# Altium PCB GCM_PCB.PcbDoc (part 1 of 2)
Units mm, origin at the board's own origin, x right, y up, seen from the top; angles counter-clockwise.
Board outline 98 x 97 mm, 4 copper layers (Top Layer, GND, Power and signals, Bottom Layer), stack 0.603 mm thick; 110 components, 82 nets, 466 pads, 160 vias.
Unrouted connection lines stored in the file: 67.
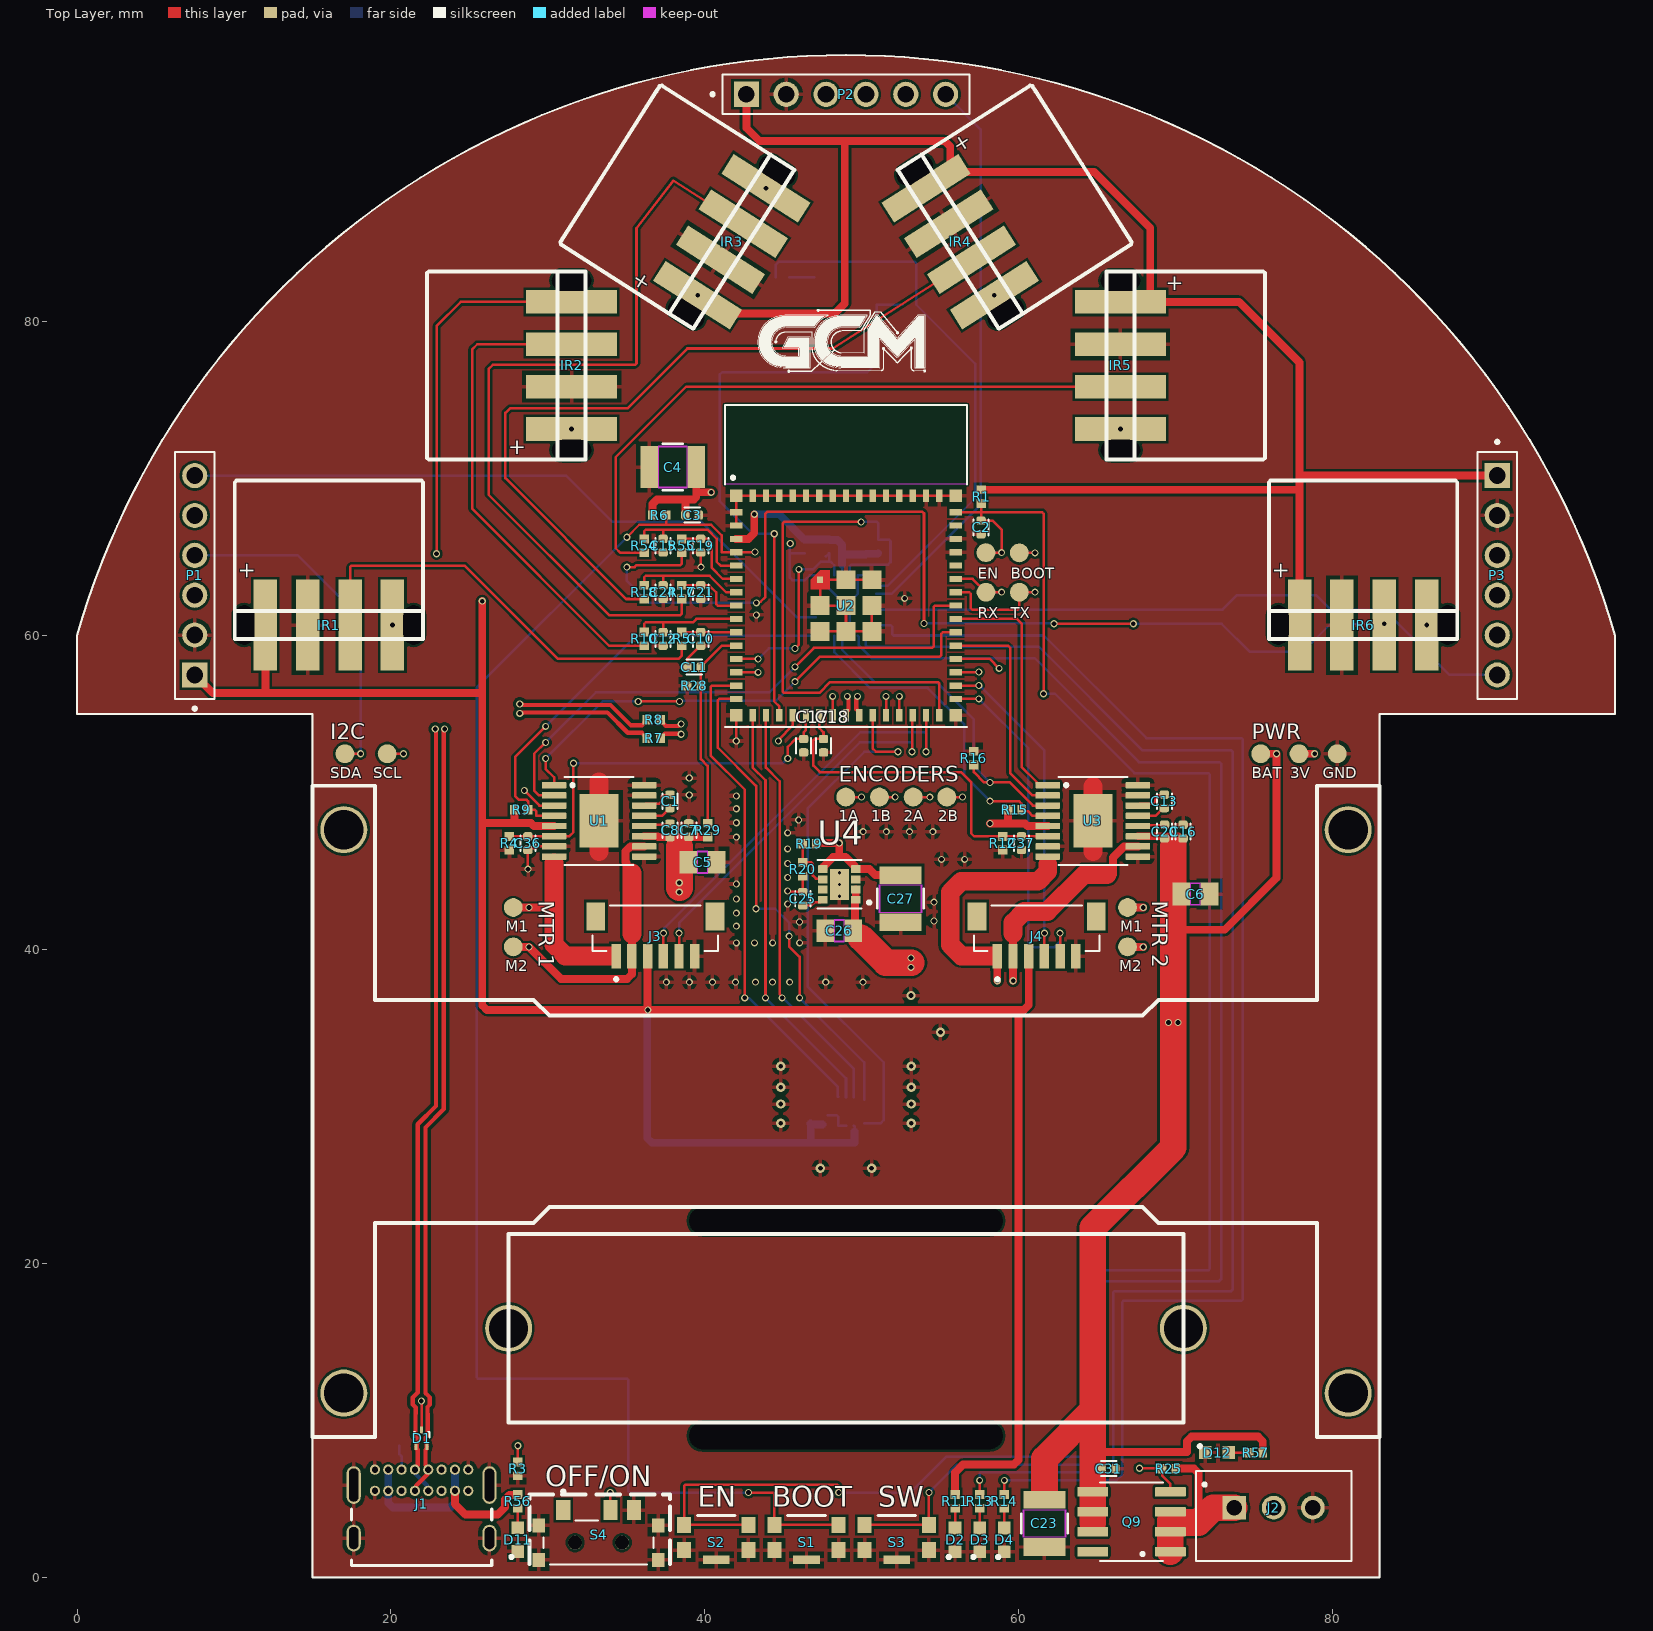
[diagram p0: Top Layer view]
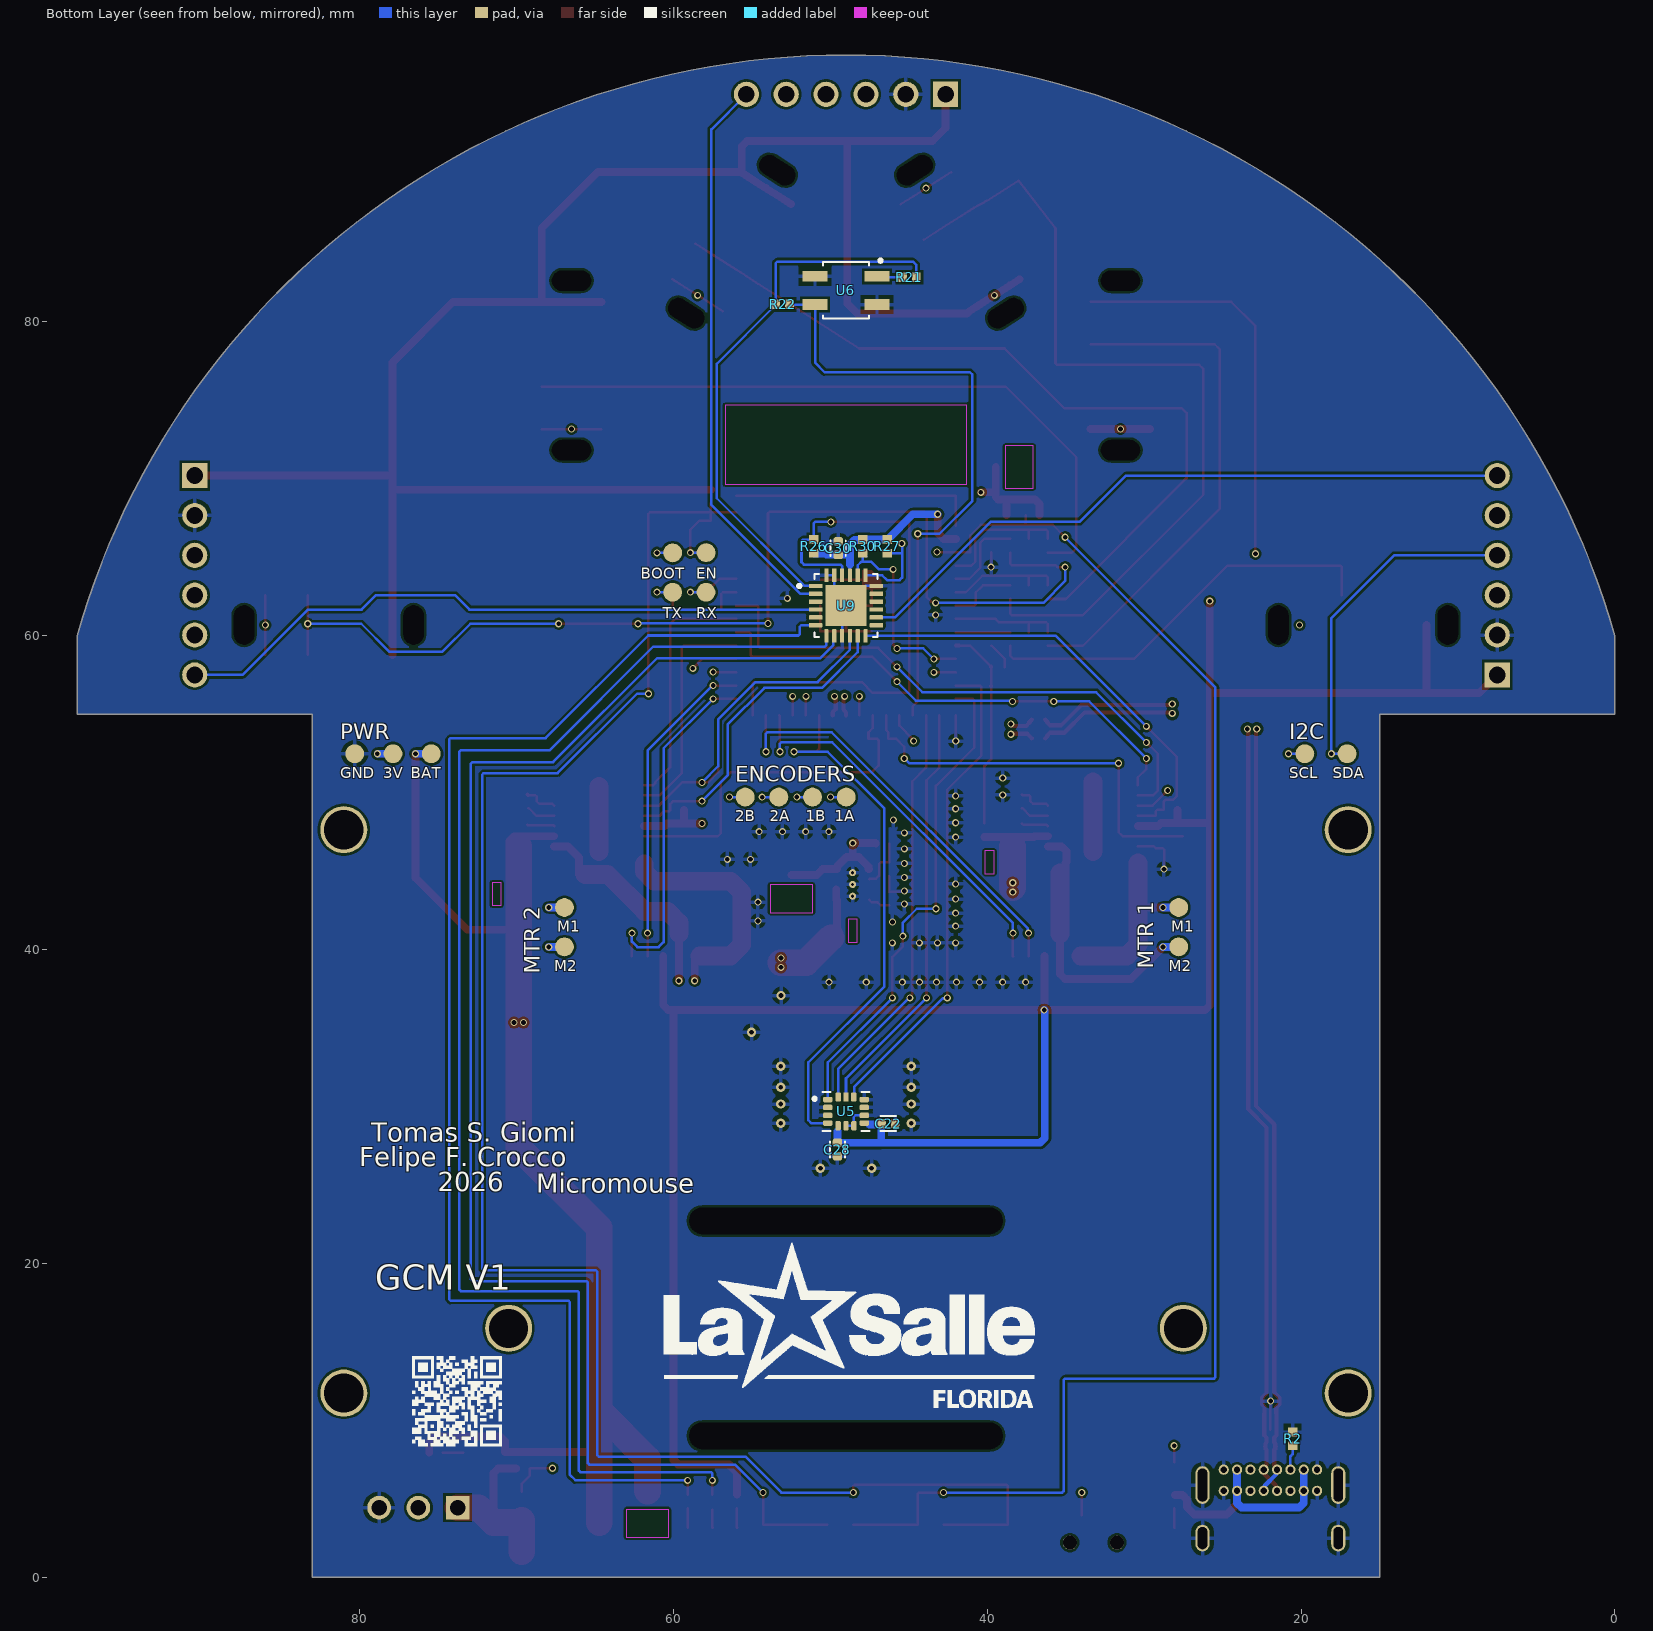
[diagram p1: Bottom Layer view, seen from below]
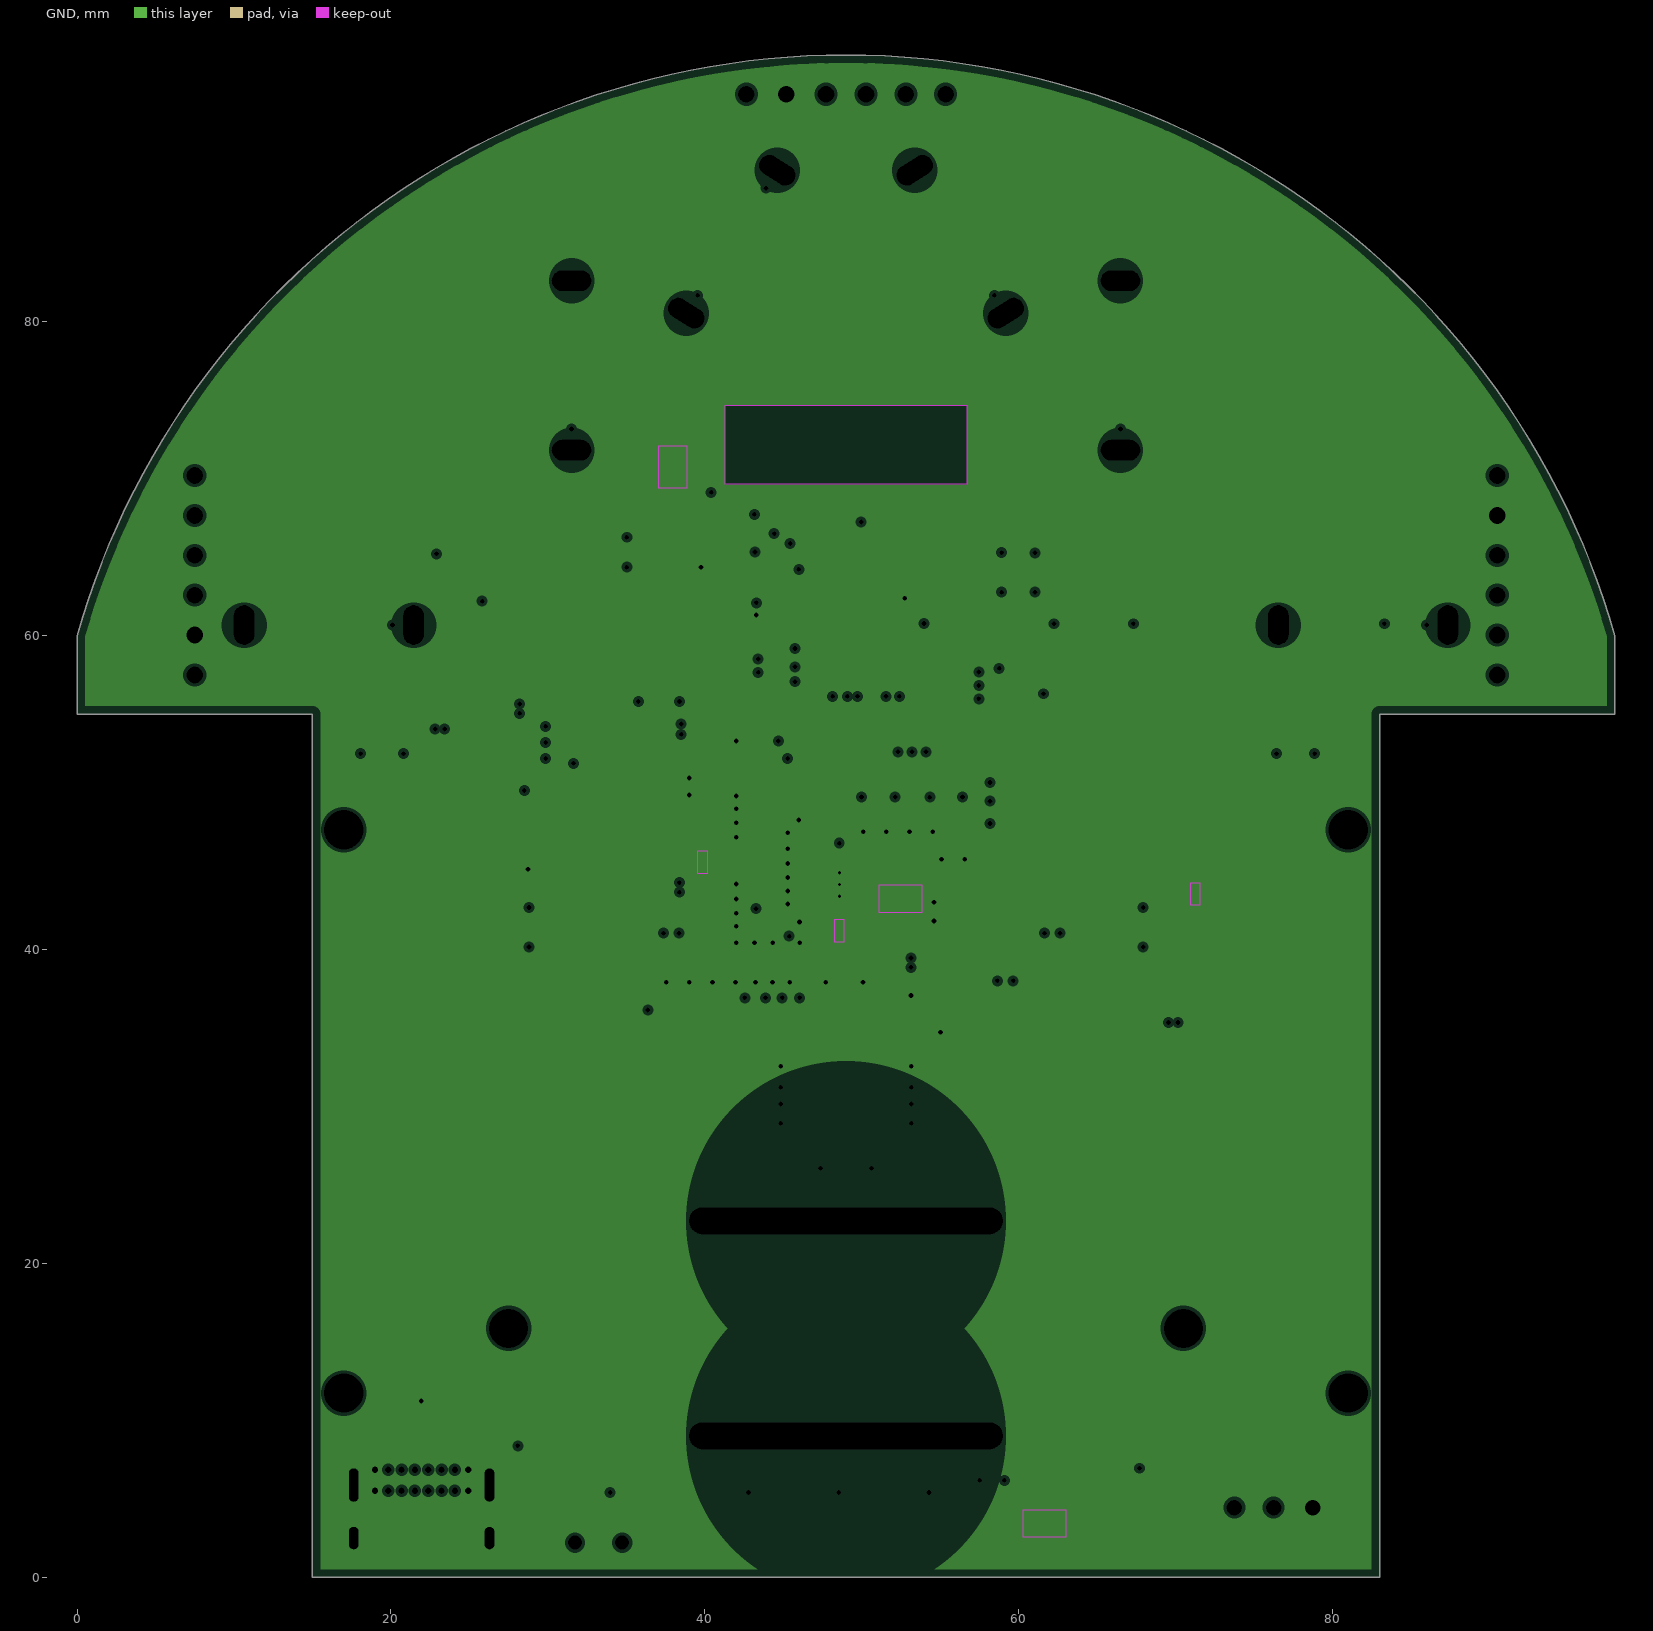
[diagram p2: GND, clearances drawn from the general rule]
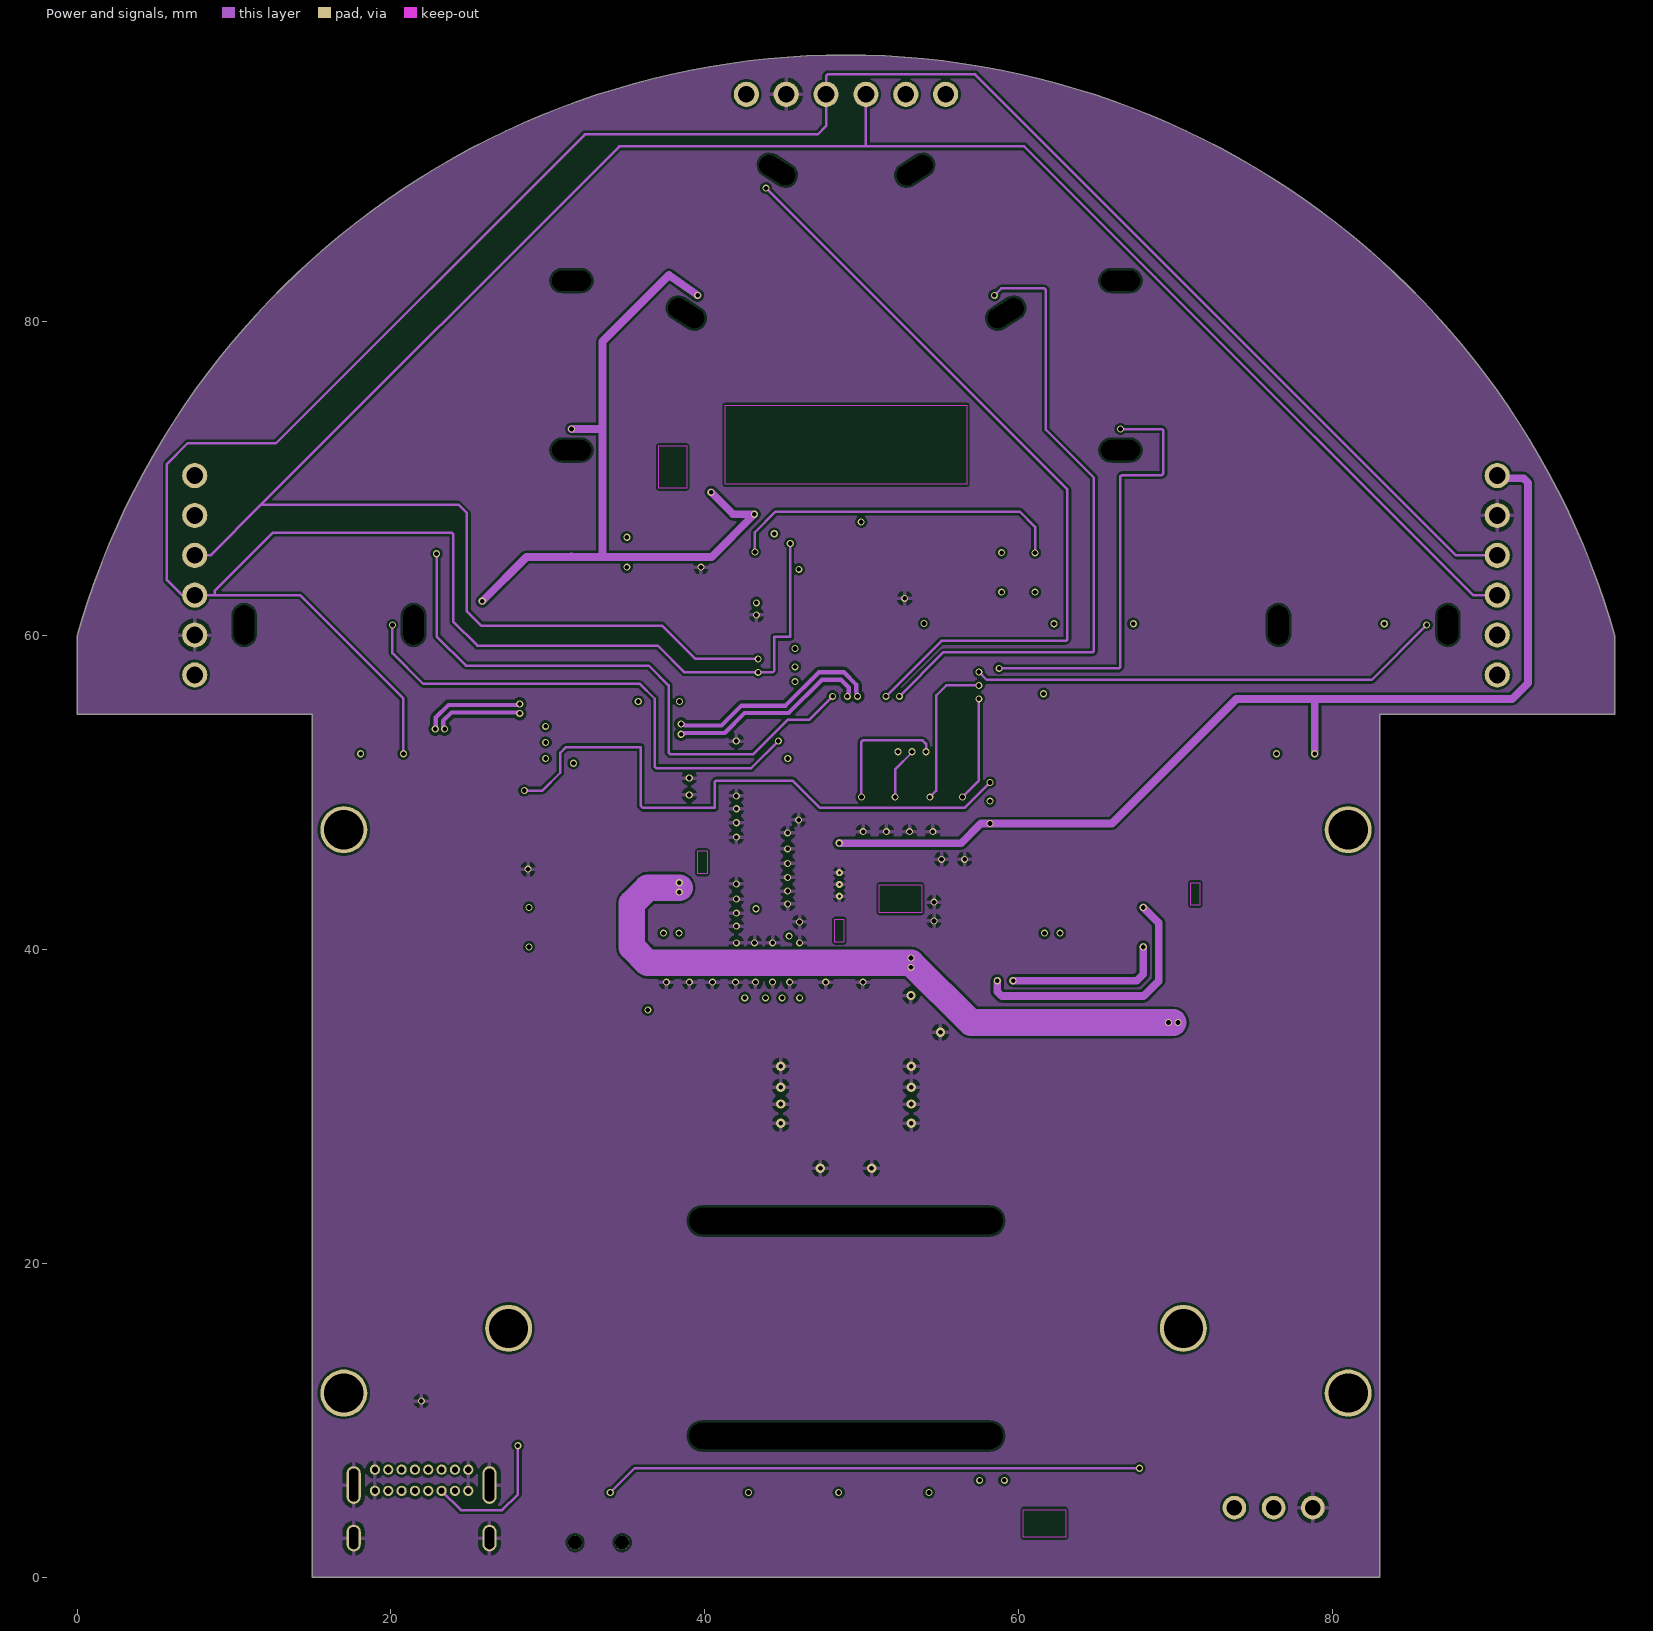
[diagram p3: Power and signals]

## Layer stack, top to bottom
Top Solder: solder mask 0.0102, Solder Resist, Dk 3.5
Top Layer: signal copper 0.0356
Dielectric 2: prepreg 0.0711, PP-006, Dk 4.1
GND: plane copper 0.035, net GND
Dielectric 1: dielectric 0.32, FR-4, Dk 4.8
Power and signals: signal copper 0.035
Dielectric 3: prepreg 0.0711, PP-006, Dk 4.1
Bottom Layer: signal copper 0.0356
Bottom Solder: solder mask 0.0102, Solder Resist, Dk 3.5

## Board outline
0,55 15,55 15,0 83,0 83,55 98,55 98,60 ccw(c49,46.054) 0,60

## Design rules (kind name [scope] priority, off if disabled: settings)
Clearance Clearance_USB [InNetClass('USB') vs InNet('GND')] p1: gap=0.203 ignorepadtopadclearanceinfootprint=FALSE
Clearance [All] p2: gap=0.15 ignorepadtopadclearanceinfootprint=FALSE
ComponentClearance [All] p1: gap=0 collisioncheckmode=3 verticalgap=2540 showdistances=FALSE checkcomponentboundary=TRUE
DiffPairsRouting [All] p1: maxlimit=0.23 minlimit=0.18 mostfreqgap=0.203 toplayer_minwidth=0.25 toplayer_maxwidth=0.29 toplayer_prefwidth=0.27 midlayer1_minwidth=0.25 midlayer1_maxwidth=0.29 midlayer1_prefwidth=0.27 bottomlayer_minwidth=0.25 bottomlayer_maxwidth=0.29 bottomlayer_prefwidth=0.27 maxuncoupledlength=12.7
PlaneClearance [All] p1: clearance=0.2
PlaneConnect [All] p1: planeconnectstyle=Relief reliefexpansion=0.508 reliefentries=4 reliefconductorwidth=0.254 reliefairgap=0.254
PolygonConnect [All] p1: connectstyle=Relief reliefconductorwidth=0.254 reliefentries=4 polygonreliefangle="90 Angle" airgapwidth=0.254
RoutingVias [All] p1: holewidth=0.3 width=0.45 viastyle="Through Hole" minholewidth=0.3 minwidth=0.45 maxholewidth=0.3 maxwidth=0.45
SolderMaskExpansion [All] p1: expansion=0.102 istentingtop=FALSE
Width [All] p1: maxlimit=1.7 minlimit=0.16 preferedwidth=0.5
26 further rules are at their usual default settings.

## Classes and differential pairs
net class 1.2mm: "1 M1" "1 M2" "2 M1" "2 M2" BAT "VM M1"
net class 0.5mm: VDDIO
component class GCM_SCH_ESP: C1 C2 C3 C4 C5 C6 C7 C8 C10 C11 C12 C13 C15 C16 C17 C18 C19 C20 C21 C22 C23 C24 C25 C26 C27 C28 C30 C31 C36 C37 D1 D2 D3 D4 D11 D12 H1 H2 H3 H4 H5 H6 IR1 IR2 IR3 IR4 IR5 IR6 J1 J2 J3 J4 P1 P2 P3 Q9 R1 R2 R3 R4 R5 R6 R7 R8 R9 R10 R11 R12 R13 R14 R15 R16 R17 R18 R19 R20 R21 R22 R25 R26 R27 R28 R29 R30 R54 R55 R56 R57 S1 S2 S3 S4 U1 U2 U3 U5 U6 U9
differential pair 2USB: +2USB_P -2USB_N
differential pair USB: +USB_P -USB_N

## Components (designator, comment, footprint, x,y, rotation, side; value= is the part's Value field where it differs from the comment)
C1 "C426639" CAPC1005X55N 37.786,49.444 r90 top
C2 "C541465" CAPC1005X55N 57.606,66.897 r90 top
C3 "C541465" CAPC1005X55N 39.193,67.688 r0 top
C4 "C126615" CAP_CC1210_YAG 37.956,70.747 r0 top
C5 "C326595" CAP_CC0805_YAG 39.856,45.567 r180 top
C6 "C326595" CAP_CC0805_YAG 71.266,43.537 r180 top
C7 "C541465" CAPC1005X55N 38.986,47.607 r90 top
C8 "C541465" CAPC1005X55N 37.786,47.597 r270 top
C10 "C76971" CAPC1005X55N 39.746,59.792 r270 top
C11 "C541465" CAPC1005X55N 39.321,57.996 r180 top
C12 "C76971" CAPC1005X55N 37.346,59.792 r270 top
C13 "C426639" CAPC1005X55N 69.286,49.444 r90 top
C15 "C76971" CAPC1005X55N 37.346,65.737 r270 top
C16 "C541465" CAPC1005X55N 70.48,47.52 r90 top
C17 "C541443" CAPC1005X55N 46.296,52.987 r270 top
C18 "C541443" CAPC1005X55N 47.566,52.987 r270 top
C19 "C76971" CAPC1005X55N 39.746,65.737 r270 top
C20 "C541465" CAPC1005X55N 69.3,47.52 r270 top
C21 "C76971" CAPC1005X55N 39.746,62.778 r270 top
C22 "C541465" CAPC1005X55N 46.306,28.907 r180 bottom
C23 "C126615" CAP_CC1210_YAG 61.646,3.427 r90 top
C24 "C76971" CAPC1005X55N 37.346,62.778 r270 top
C25 "C527004" CAPC1005X55N 46.246,43.237 r90 top
C26 "C326595" CAP_CC0805_YAG 48.576,41.199 r0 top
C27 "C126615" CAP_CC1210_YAG 52.476,43.247 r90 top
C28 "C541465" CAPC1005X55N 49.546,27.257 r270 bottom
C30 "C541465" CAPC1005X55N 49.496,65.577 r90 bottom
C31 "C541465" CAPC1005X55N 65.736,6.927 r0 top
C36 "C541443" CAPC1005X55N 28.729,46.777 r270 top
C37 "C541443" CAPC1005X55N 60.183,46.777 r270 top
D1 "C97502" SOTFL35P100X50-3N 21.956,8.872 r90 top
D2 "C12624" LED_SM0603UYC 55.946,2.39 r90 top
D3 "C965799" LED_SM0603UYC 57.52,2.39 r90 top
D4 "C965799" LED_SM0603UYC 59.094,2.39 r90 top
D11 "C2987539" LED_SM0603UYC 28.08,2.393 r90 top
D12 "C12624" LED_SM0603UYC 72.65,7.95 r0 top
IR1 "IR PCB" "IR Board pins" 14.559,63.986 r90 top
IR2 "IR PCB" "IR Board pins" 28.204,75.729 r180 top
IR3 "IR PCB" "IR Board pins" 38.132,85.624 r147.5 top
IR4 "IR PCB" "IR Board pins" 58.266,88.139 r32.5 top
IR5 "IR PCB" "IR Board pins" 69.796,78.711 r0 top
IR6 "IR PCB" "IR Board pins" 80.459,63.986 r90 top
J1 "C7095263" GCT_USB4085-GF-A_REVA4 21.956,2.497 r0 top
J2 "C144394" JST_B3B-XH-A 76.25,3.91 r180 top
J3 "C160392" JST-SH6 36.856,41.357 r0 top locked
J4 "C160392" JST-SH6 61.144,41.357 r0 top locked
P1 "C40877" FHDR1X6 7.5,63.85 r90 top locked
P2 "C40877" FHDR1X6 49,94.5 r0 top
P3 "C40877" FHDR1X6 90.5,63.85 r270 top locked
Q9 "C51499" SOIC127P600X175-8N 67.196,3.537 r180 top
R1 "C190095" RESC1005X35N 57.606,68.867 r90 top
R2 "C851064" RESC1005X35N 20.536,8.817 r90 bottom
R3 "C851064" RESC1005X35N 28.08,6.905 r270 top
R4 "C284546" RESC1005X35N 27.529,46.777 r270 top
R5 "C513664" RESC1005X35N 38.546,59.792 r90 top
R6 "C190095" RESC1005X35N 37.103,67.688 r180 top
R7 "C853143" RESC1005X35N 36.736,53.452 r0 top
R8 "C853143" RESC1005X35N 36.736,54.647 r0 top
R9 "C190095" RESC1005X35N 28.306,48.897 r180 top
R10 "C513664" RESC1005X35N 36.146,59.792 r90 top
R11 "C445579" RESC1005X35N 55.95,4.835 r90 top
R12 "C284546" RESC1005X35N 58.983,46.777 r270 top
R13 "C852886" RESC1005X35N 57.52,4.835 r90 top
R14 "C852886" RESC1005X35N 59.094,4.835 r90 top
R15 "C190095" RESC1005X35N 59.758,48.897 r180 top
R16 "C190095" RESC1005X35N 57.148,52.199 r270 top
R17 "C513664" RESC1005X35N 38.546,62.778 r90 top
R18 "C513664" RESC1005X35N 36.146,62.773 r90 top
R19 "C281774" RESC1005X35N 46.666,46.737 r180 top
R20 "C281778" RESC1005X35N 46.25,45.112 r270 top
R21 "C705627" RESC1005X35N 44.956,82.847 r180 bottom
R22 "C852763" RESC1005X35N 53.041,81.107 r0 bottom
R25 "C136979" RESC1005X35N 69.576,6.928 r0 top
R26 "C190095" RESC1005X35N 51.056,65.687 r90 bottom
R27 "C281778" RESC1005X35N 46.376,65.687 r270 bottom
R28 "C728561" RESC1005X35N 39.321,56.796 r180 top
R29 "C136979" RESC1005X35N 40.186,47.612 r270 top
R30 "C281778" RESC1005X35N 47.936,65.687 r90 bottom
R54 "C513664" RESC1005X35N 36.146,65.732 r90 top
R55 "C513664" RESC1005X35N 38.546,65.732 r90 top
R56 "C281775" RESC1005X35N 28.08,4.835 r90 top
R57 "C852763" RESC1005X35N 75.123,7.946 r0 top
S1 "C72443" SW_KMR221GLFS 46.483,2.532 r180 top
S2 "C72443" SW_KMR221GLFS 40.733,2.532 r180 top
S3 "C72443" SW_KMR221GLFS 52.233,2.532 r180 top
S4 "C431540" SW_MSK12C02 33.233,2.208 r0 top
U1 "C1855818" SOP65P640X120-17N 33.269,48.197 r0 top locked
U2 "C2913206" XCVR_ESP32-S3-MINI-1-N8 49,61.917 r0 top locked
U3 "C1855818" SOP65P640X120-17N 64.731,48.197 r0 top
U4 "C473914" CONV_TPS82140SILR 48.576,44.147 r180 top
U5 "C22459454" PQFN50P300X250X97-14N 49,29.687 r180 bottom locked
U6 "C232862" SOIC180P460X187-4N 49,82 r270 bottom
U9 "C140277" QFN50P400X400X80-25N 49,61.917 r180 bottom
? "Test Point" TestPoint 66.94,40.168 r90 top
? "Test Point" TestPoint 27.8,40.168 r90 top
? "Test Point" TestPoint 27.8,42.68 r90 top
? "Test Point" TestPoint 66.94,42.68 r90 top
? "Test Point" TestPoint 19.76,52.477 r0 top
? "Test Point" TestPoint 80.306,52.477 r0 top
? "Test Point" TestPoint 60.046,65.277 r0 top
? "Test Point" TestPoint 77.866,52.477 r0 top
? "Test Point" TestPoint 75.426,52.477 r0 top
? "Test Point" TestPoint 57.916,65.292 r0 top
? "Test Point" TestPoint 57.92,62.77 r0 top
? "Test Point" TestPoint 17.07,52.477 r0 top
? "Test Point" TestPoint 60.05,62.77 r0 top
? "Test Point" TestPoint 53.279,49.717 r0 top
? "Test Point" TestPoint 51.133,49.717 r0 top
? "Test Point" TestPoint 55.426,49.717 r0 top
? "Test Point" TestPoint 48.986,49.717 r0 top

## Footprints (in the part's own frame and the unit in brackets; to place one, negate y for a bottom-side part, rotate by r counter-clockwise, add the part's x,y. Pads: shape width x height; smd on the part's side, far side on the other; paste and mask are expansions set on the pad)
CAP_CC0805_YAG [mil]
  rect 44x57 smd paste+0 mask+0: 1(-35.31,0) 2(35.31,0)
  Top Layer keep-out region: -11.31,-26.5 -11.31,26.5 11.31,26.5 11.31,-26.5
  Keep-Out Layer region: -11.31,-28.5 -11.31,28.5 11.31,28.5 11.31,-28.5
  body extent -43,-29 43,29, height 57
CAP_CC1210_YAG [mil]
  rect 44x106 smd paste+0 mask+0: 1(-59,0) 2(59,0)
  Top Layer keep-out region: -35,-51 -35,51 35,51 35,-51
  Keep-Out Layer region: -35,-53 -35,53 35,53 35,-53
  silkscreen extent -25,-58 25,58, body extent -67,-53 67,53, height 106
CAPC1005X55N [mm]
  rrect53% 0.54x0.6 smd: 1(-0.43,0) 2(0.43,0)
  silkscreen extent -0.5,-0.48 0.5,0.48, body extent -0.5,-0.25 0.5,0.25, height 0.55
CONV_TPS82140SILR [mm]
  rrect5% 0.6x0.5 smd paste-1 mask+0: 1(-1.05,0.975) 2(-1.05,0.325) 3(-1.05,-0.325) 4(-1.05,-0.975) 5(1.05,-0.975) 6(1.05,-0.325) 7(1.05,0.325) 8(1.05,0.975)
  rrect5% 1.2x2 smd paste-2 mask+0: 9(0,0)
  round 0.45 hole 0.2 mask+0: 10(0,0.75) 11(0,0) 12(0,-0.75)
  silkscreen extent -2,-1.55 1.4,1.55, body extent -1.41,-1.49 1.39,1.51, height 1.53
FHDR1X6 [mm]
  rect 1.605x1.605 / inner round 1.605 / far side rect 1.605x1.605 hole 1.07: 1(-6.35,0)
  round 1.605 hole 1.07: 2(-3.81,0) 3(-1.27,0) 4(1.27,0) 5(3.81,0) 6(6.35,0)
  silkscreen extent -8.6,-1.27 7.87,1.27, body extent -7.87,-1.27 7.88,1.27, height 8.51
GCT_USB4085-GF-A_REVA4 [mm]
  round 0.65 hole 0.4: A1(-2.975,4.36) A4(-2.125,4.36) A5(-1.275,4.36) A6(-0.425,4.36) A7(0.425,4.36) A8(1.275,4.36) A9(2.125,4.36) A12(2.975,4.36) B1(2.975,3.01) B4(2.125,3.01) B5(1.275,3.01) B6(0.425,3.01) B7(-0.425,3.01) B8(-1.275,3.01) B9(-2.125,3.01) B12(-2.975,3.01)
  oval 0.9x1.7 hole 0.6 slot 1.4 at 90 deg: S1(-4.325,0) S2(4.325,0)
  oval 0.9x2.4 hole 0.6 slot 2.1 at 90 deg: S3(-4.325,3.38) S4(4.325,3.38)
  silkscreen extent -4.47,-1.74 4.47,1.85, body extent -4.47,-4.25 4.47,4.92, height 3.46
"IR Board pins" [mm]
  rect 5.8x1.5 smd: 1(-3.306,2.559) 2(-3.306,-0.141) 3(-3.306,-2.841) 4(-3.306,-5.541)
  rect 1x1 hole 1.3 slot 2.5 at 0 deg: 13(-3.306,3.909) 13(-3.306,-6.891)
  silkscreen extent -4.21,-7.49 5.89,4.51
JST-SH6 [mm]
  rect 0.6x1.55 smd: 1(-2.5,-1.775) 2(-1.5,-1.775) 3(-0.5,-1.775) 4(0.5,-1.775) 5(1.5,-1.775) 6(2.5,-1.775)
  rect 1.2x1.8 smd: S1(-3.8,0.75) S2(3.8,0.75)
  silkscreen extent -4,-3.35 4,1.45, body extent -3.87,-2.14 4.13,1.46, height 4.25
JST_B3B-XH-A [mm]
  rect 1.508x1.508 / inner round 1.508 / far side rect 1.508x1.508 hole 1 mask+0.102: 1(2.5,-0.525)
  round 1.508 hole 1 mask+0.102: 2(0,-0.525) 3(-2.5,-0.525)
  silkscreen extent -4.95,-2.88 4.95,2.88, body extent -4.95,-2.88 4.95,2.88, height 7
LED_SM0603UYC [mm]
  rect 0.8x0.8 smd: A(0.75,0) C(-0.75,0)
  silkscreen extent -1.2,0.3 -1,0.5, body extent -0.8,-0.4 0.8,0.4, height 0.6
PQFN50P300X250X97-14N [mm]
  rrect50% 0.59x0.35 smd mask+0: 1(-1.165,0.75) 2(-1.165,0.25) 3(-1.165,-0.25) 4(-1.165,-0.75) 8(1.165,-0.75) 9(1.165,-0.25) 10(1.165,0.25) 11(1.165,0.75)
  rrect50% 0.35x0.59 smd mask+0: 5(-0.5,-0.915) 6(0,-0.915) 7(0.5,-0.915) 12(0.5,0.915) 13(0,0.915) 14(-0.5,0.915)
  silkscreen extent -2.1,-1.25 1.5,1.25, body extent -1.5,-1.27 1.5,1.23, height 0.97
QFN50P400X400X80-25N [mm]
  rrect25% 0.86x0.27 smd: 1(-1.935,1.25) 2(-1.935,0.75) 3(-1.935,0.25) 4(-1.935,-0.25) 5(-1.935,-0.75) 6(-1.935,-1.25) 13(1.935,-1.25) 14(1.935,-0.75) 15(1.935,-0.25) 16(1.935,0.25) 17(1.935,0.75) 18(1.935,1.25)
  rrect25% 0.27x0.86 smd: 7(-1.25,-1.935) 8(-0.75,-1.935) 9(-0.25,-1.935) 10(0.25,-1.935) 11(0.75,-1.935) 12(1.25,-1.935) 19(1.25,1.935) 20(0.75,1.935) 21(0.25,1.935) 22(-0.25,1.935) 23(-0.75,1.935) 24(-1.25,1.935)
  rect 2.6x2.6 smd paste-2: 25(0,0)
  silkscreen extent -3.08,-2 2,2, body extent -2,-2 2,2, height 0.8
RESC1005X35N [mm]
  rect 0.56x0.6 smd paste+0 mask+0.102: 1(-0.435,0) 2(0.435,0)
  body extent -0.5,-0.25 0.5,0.25, height 0.35
SOIC127P600X175-8N [mm]
  rrect15% 1.97x0.6 smd: 1(-2.475,1.905) 2(-2.475,0.635) 3(-2.475,-0.635) 4(-2.475,-1.905) 5(2.475,-1.905) 6(2.475,-0.635) 7(2.475,0.635) 8(2.475,1.905)
  silkscreen extent -2,-2.5 2,2.5, body extent -3,-2.45 3,2.45, height 1.75
SOIC180P460X187-4N [mm]
  rect 0.69x1.57 smd: 1(-0.9,1.975) 2(-0.9,-1.975) 3(0.9,-1.975) 4(0.9,1.975)
  silkscreen extent -2,-1.45 1.8,2.3, body extent -1.7,-2.3 1.7,2.3, height 1.87
SOP65P640X120-17N [mm]
  rrect25% 1.57x0.41 smd: 1(-2.87,2.275) 2(-2.87,1.625) 3(-2.87,0.975) 4(-2.87,0.325) 5(-2.87,-0.325) 6(-2.87,-0.975) 7(-2.87,-1.625) 8(-2.87,-2.275) 9(2.87,-2.275) 10(2.87,-1.625) 11(2.87,-0.975) 12(2.87,-0.325) 13(2.87,0.325) 14(2.87,0.975) 15(2.87,1.625) 16(2.87,2.275)
  rect 2.48x3.4 smd paste-3: 17(0,0)
  silkscreen extent -2.2,-2.8 2.2,2.8, body extent -3.2,-2.5 3.2,2.5, height 1.2
SOTFL35P100X50-3N [mm]
  rrect25% 0.46x0.2 smd: 1(-0.52,0.35) 2(-0.52,-0.35) 3(0.52,0)
  silkscreen extent 0.03,-0.5 0.4,0.5, body extent -0.5,-0.5 0.5,0.5, height 0.5
SW_KMR221GLFS [mm]
  rect 0.9x1 smd: 1(-2.05,0.8) 2(-2.05,-0.8) 3(2.05,-0.8) 4(2.05,0.8)
  rect 1.7x0.55 smd: 5(0,1.425)
  silkscreen extent -1.2,-1.4 1.2,-1.4, body extent -2.3,-1.4 2.3,1.4, height 1.9
SW_MSK12C02 [mm]
  rect 0.9x1.25 smd paste+0 mask+0.102: 1(-2.25,2.075) 2(0.75,2.075) 3(2.25,2.075)
  rect 0.8x0.9 smd paste+0 mask+0.102: 4_1(-3.8,1.1) 4_2(-3.8,-1.1) 4_3(3.8,-1.1) 4_4(3.8,1.1)
  round 0.9 hole 0.9 unplated mask+0: ""(-1.5,0) ""(1.5,0)
  silkscreen extent -3.5,-1.4 3.5,3.35, body extent -4,-2.75 4,2.4, height 1.5
TestPoint [mm]
  round 1.2 smd: 1(0,0)
  round 1.2 smd far side: 1(0,0)
XCVR_ESP32-S3-MINI-1-N8 [mm]
  rect 0.8x0.4 smd: 1(-7,5.95) 2(-7,5.1) 3(-7,4.25) 4(-7,3.4) 5(-7,2.55) 6(-7,1.7) 7(-7,0.85) 8(-7,0) 9(-7,-0.85) 10(-7,-1.7) 11(-7,-2.55) 12(-7,-3.4) 13(-7,-4.25) 14(-7,-5.1) 15(-7,-5.95) 31(7,-5.95) 32(7,-5.1) 33(7,-4.25) 34(7,-3.4) 35(7,-2.55) 36(7,-1.7) 37(7,-0.85) 38(7,0) 39(7,0.85) 40(7,1.7) 41(7,2.55) 42(7,3.4) 43(7,4.25) 44(7,5.1) 45(7,5.95)
  rect 0.4x0.8 smd: 16(-5.95,-7) 17(-5.1,-7) 18(-4.25,-7) 19(-3.4,-7) 20(-2.55,-7) 21(-1.7,-7) 22(-0.85,-7) 23(0,-7) 24(0.85,-7) 25(1.7,-7) 26(2.55,-7) 27(3.4,-7) 28(4.25,-7) 29(5.1,-7) 30(5.95,-7) 46(5.95,7) 47(5.1,7) 48(4.25,7) 49(3.4,7) 50(2.55,7) 51(1.7,7) 52(0.85,7) 53(0,7) 54(-0.85,7) 55(-1.7,7) 56(-2.55,7) 57(-3.4,7) 58(-4.25,7) 59(-5.1,7) 60(-5.95,7)
  rect 1.2x1.2 smd: 61(0,0) 61_2(0,1.65) 61_3(1.65,1.65) 61_4(1.65,0) 61_5(1.65,-1.65) 61_6(0,-1.65) 61_7(-1.65,-1.65) 61_8(-1.65,0)
  rect 0.4x0.4 smd paste-1 mask+0: 61_1(-1.65,1.65)
  rect 0.8x0.8 smd: 62(-7,7) 63(-7,-7) 64(7,-7) 65(7,7)
  Top Layer region: -1.05,1.05 -2.25,1.05 -2.25,1.65 -1.65,2.25 -1.05,2.25
  Keep-Out Layer region: 7.7,7.725 -7.7,7.725 -7.7,12.775 7.7,12.775
  Keep-Out Layer region: 7.7,7.725 -7.7,7.725 -7.7,12.775 7.7,12.775
  silkscreen extent -7.7,-7.73 7.7,12.78, body extent -7.7,-7.73 7.7,12.77, height 2.55

## Part data
C1 C2 C3 C7 C8 C10 C11 C12 C13 C15 C16 C17 C18 C19 C20 C21 C22 C24 C25 C28 C30 C31 C36 C37: library part CC0402JRX7R8BB103, "10000 pF Â±5% 25V Ceramic Capacitor X7R 0402 (1005 Metric)", Package="0402 Yageo", Check_prices=https://www.snapeda.com/parts/CC0402JRX7R8BB103/Yageo/view-part/?ref=eda, MF=Yageo, MP=CC0402JRX7R8BB103, SnapEDA_Link=https://www.snapeda.com/parts/CC0402JRX7R8BB103/Yageo/view-part/?ref=snap
C4 C23 C27: library part CC1210KKX7R7BB226, "Description", Manufacturer_Name=Yageo, Copyright="Copyright (C) 2026 Ultra Librarian. All rights reserved.", Manufacturer_Part_Number=CC1210KKX7R7BB226
C5 C6 C26: library part CC0805KKX7R7BB106, "Description", Manufacturer_Name=Yageo, Copyright="Copyright (C) 2026 Ultra Librarian. All rights reserved.", Manufacturer_Part_Number=CC0805KKX7R7BB106
D1: library part TPD2EUSB30DRTR, "2-channel ESD solution for SuperSpeed USB 3.0 interface 3-SOT-9X3 -40 to 85", Package="SOT-9X3-3 Texas Instruments", Availability=Warning, MF="Texas Instruments", MP=TPD2EUSB30DRTR, Price=None, Purchase-URL=https://pricing.snapeda.com/search/part/TPD2EUSB30DRTR/?ref=eda, SnapEDA_Link=https://www.snapeda.com/parts/TPD2EUSB30DRTR/Texas%20Instruments/view-part/189118/?ref=snap
D2 D3 D4 D11 D12: library part SM0603UYC, "LED SMD 0603 Ultra Yellow 593nm 70mcd Water Clear Lens 130 Deg Viewing Angle", Package="0603 Bivar", Check_prices=https://www.snapeda.com/parts/SM0603UYC/Bivar/view-part/?ref=eda, MF=Bivar, MP=SM0603UYC, SnapEDA_Link=https://www.snapeda.com/parts/SM0603UYC/Bivar/view-part/?ref=snap
J1: library part USB4085-GF-A_REVA4, "USB-C (USB TYPE-C) USB 2.0 Receptacle Connector 24 (16+8 Dummy) Position Through Hole, Right Angle, low cost, 3.46mm profile, 16 pin, horizontal, Top mount", Package=None, Availability="In Stock", Check_prices=https://www.snapeda.com/parts/USB4085-GF-A/Global+Connector+Technology/view-part/?ref=eda, MF="Global Connector Technology", MP=USB4085-GF-A, Price=None, Purchase-URL=https://pricing.snapeda.com/search/part/USB4085-GF-A/?ref=eda, SnapEDA_Link=https://www.snapeda.com/parts/USB4085-GF-A/Global+Connector+Technology/view-part/?ref=snap
J2: library part B3B-XH-A, "Connector Header Through Hole 3 position 0.098 (2.50mm)", Package=None, Check_prices=https://www.snapeda.com/parts/B3B-XH-A/JST/view-part/?ref=eda, MF="JST Sales", MP=B3B-XH-A, SnapEDA_Link=https://www.snapeda.com/parts/B3B-XH-A/JST/view-part/?ref=snap
J3 J4: library part JST-SH6, Package=None, Availability=Unavailable, MP=BM06B-SRSS-TB(LF)(SN), Price=None
P1 P2 P3: library part "FHeader 6X1", LatestRevisionDate=17-Jul-2002, LatestRevisionNote="Re-released for DXP Platform.", Publisher="Altium Limited"
Q9: library part AO4485, "P-Channel 40 V 10A (Ta) 1.7W (Ta) Surface Mount 8-SOIC", Package="SOIC-8 Alpha &amp; Omega Semiconductor", Check_prices=https://www.snapeda.com/parts/AO4485/Alpha/view-part/?ref=eda, MF="Alpha &", MP=AO4485, SnapEDA_Link=https://www.snapeda.com/parts/AO4485/Alpha/view-part/?ref=snap
R1 R2 R3 R4 R5 R6 R7 R8 R9 R10 R11 R12 R13 R14 R15 R16 R17 R18 R19 R20 R21 R22 R25 R26 R27 R28 R29 R30 R54 R55 R56 R57: library part RT0402FRE0724KL, "RT Series 0402 0.063 W 24 kOhm Â±1 % Â±50 ppm/Â°C SMT Thin Film Chip Resistor", Package="1005 Yageo", Check_prices=https://www.snapeda.com/parts/RT0402FRE0724KL/Yageo/view-part/?ref=eda, MF=Yageo, MP=RT0402FRE0724KL, SnapEDA_Link=https://www.snapeda.com/parts/RT0402FRE0724KL/Yageo/view-part/?ref=snap
S1 S2 S3: library part KMR221GLFS, "Switch Tactile N.O. SPST Button Gull Wing 0.05A 32VDC 1VA 200000Cycles 2N SMD Automotive T/R", Package=None, Check_prices=https://www.snapeda.com/parts/KMR221G%20LFS/C%2526K/view-part/?ref=eda, MF=CK, MP="KMR221G LFS", SnapEDA_Link=https://www.snapeda.com/parts/KMR221G%20LFS/C%2526K/view-part/?ref=snap
S4: library part MSK12C02, Package=None, Availability=Unavailable, MP=MSK12C02, Price=None
U1 U3: library part DRV8874PWPR, "40-V, 6-A H-bridge motor driver with integrated current sensing feedback", Package="HTSSOP-16 Texas Instruments", Check_prices=https://www.snapeda.com/parts/DRV8874PWPR/Texas+Instruments/view-part/?ref=eda, MF="Texas Instruments", MP=DRV8874PWPR, SnapEDA_Link=https://www.snapeda.com/parts/DRV8874PWPR/Texas+Instruments/view-part/?ref=snap
U2: library part ESP32-S3-MINI-1-N8, Package=None, Availability=Unavailable, MF="{'manufacturer': u'Espressif Systems'}", MP=ESP32-S3-MINI-1-N8, Price=None
U4: library part TPS82130SILT, "Non-Isolated PoL Module DC DC Converter 1 Output 0.9 ~ 5V - - - 3A 3V - 17V Input", Package=None, Check_prices=https://www.snapeda.com/parts/TPS82130SIL/Texas+Instruments/view-part/?ref=eda, MF="Texas Instruments", MP=TPS82130SIL, SnapEDA_Link=https://www.snapeda.com/parts/TPS82130SIL/Texas+Instruments/view-part/?ref=snap
U5: library part ICM-45686, "Accelerometer, Gyroscope, 6 Axis Sensor Output", Package=None, Availability=Unavailable, MP=ICM-42688-P, Price=None
U6: library part QRE1113GR, "Reflective Optical Sensor 0.039 (1mm) 4-SMD, Gull Wing", Package="ARUSM-313-4 ON Semiconductor", Availability="In Stock", Check_prices=https://www.snapeda.com/parts/QRE1113GR/Onsemi/view-part/?ref=eda, MF="ON Semiconductor", MP=QRE1113GR, Price=None, Purchase-URL=https://pricing.snapeda.com/search/part/QRE1113GR/?ref=eda, SnapEDA_Link=https://www.snapeda.com/parts/QRE1113GR/Onsemi/view-part/?ref=snap
U9: library part TCA9555RTWR, Package=None, Availability=Unavailable, MP=TCA9555RTWR, Price=None

## Free pads (board coordinates)
  round 3 hole 2.5: 3(17,11.737) 3(17,47.637) 3(27.5,15.86) 3(70.5,15.86) 3(81,11.737) 3(81,47.637)
  round 1 hole 1.7 slot 20 at 0 deg: 11(49,9.01) 11(49,22.71)

## Via types
v1: diameter 0.45, hole 0.3, Top Layer to Bottom Layer, 148 vias
v2: diameter 0.6, hole 0.3, Top Layer to Bottom Layer, 12 vias

## Nets (pads, with @x,y where several pads share a name; then routed paths per layer and width w, separated by ;. In a path a pad name is that pad's centre, name@x,y a point inside that pad or via, vN(x,y) a via of type N, cw(c..) or ccw(c..) an arc to the next point about the centre after c; other vN are vias at no path point)
"1 A": ?.1@48.986,49.717 J3.4 U2.29 | length 37.4
  Top Layer w0.16: J3.4@37.356,39.582 37.365,39.591 v1@37.365,41.037 ; ?.1@48.986,49.717 v1(49.986,49.717) ; v1(54.101,52.602) U2.29@54.1,54.917
  Power and signals w0.16: v1(49.986,49.717) 49.986,53.23 50.08,53.324 53.875,53.324 54.101,53.098 v1(54.101,52.602)
  Bottom Layer w0.16: v1@37.365,41.037 37.407,41.079 37.407,41.337 49.915,53.845 54.007,53.845 54.1,53.751 v1(54.101,52.602) ; ?.1@48.986,49.717 v1(49.986,49.717)
  other v1: 37.365,41.041
"1 B": ?.1@51.133,49.717 J3.5 U2.28 | length 30
  Top Layer w0.16: J3.5@38.356,39.582 38.36,39.586 v1(38.36,41.041) ; ?.1@51.133,49.717 v1(52.133,49.717) ; v1(53.21,52.602) 53.21,54.878 U2.28@53.25,54.917
  Power and signals w0.16: v1(52.133,49.717) 52.133,51.48 v1@53.255,52.602
  Bottom Layer w0.16: v1(38.36,41.041) 38.368,41.05 38.368,41.7 49.875,53.206 53.117,53.206 53.21,53.112 v1(53.21,52.602) ; ?.1@51.133,49.717 v1(52.133,49.717)
"1 M1": ?.1@27.8,42.68 J3.1 U1.8 | length 13.2
  Top Layer w0.5: ?.1@27.8,42.68 v1(28.8,42.68) 30.354,42.68 30.4,42.634 ; 30.399,44.968 30.4,44.967 ; 30.399,45.617 30.399,45.7 ; 34.036,39.598 34.34,39.598 J3.1@34.356,39.582
  Top Layer w1.2: 30.399,44.968 30.399,45.517 ; 30.4,44.967 30.4,42.634 30.4,40.301 31.103,39.598 34.036,39.598
  Bottom Layer w0.5: ?.1@27.8,42.68 v1(28.8,42.68)
"1 M2": ?.1@27.8,40.168 J3.2 U1.10 | length 19.9
  Top Layer w0.5: ?.1@27.8,40.168 v1(28.8,40.168) 30.838,38.13 35.063,38.13 35.356,38.423 35.356,40.984 ; 35.006,43.726 35.006,45.53 34.954,45.582 34.954,46.263 35.263,46.572 U1.10@36.139,46.572
  Top Layer w1.2: 35.356,40.984 35.356,44.88
  Bottom Layer w0.5: ?.1@27.8,40.168 v1(28.8,40.168)
"2 A": ?.1@53.279,49.717 J4.4 U2.32 | length 32.2
  Top Layer w0.16: ?.1@53.284,49.712 v1(54.341,49.712) ; U2.32@56,56.817 56.006,56.824 57.493,56.824 v1@57.5,56.83 ; J4.4@61.644,39.582 61.644,41.037 v1(61.648,41.041) v1@61.648,41.146
  Power and signals w0.16: v1(54.341,49.712) 54.751,50.123 54.751,56.193 55.389,56.83 v1(57.468,56.83)
  Bottom Layer w0.16: ?.1@53.284,49.712 v1(54.341,49.712) ; v1@57.5,56.83 61.648,52.682 v1@61.648,41.146
"2 B": ?.1@55.426,49.717 J4.5 U2.31 | length 31.3
  Top Layer w0.16: ?.1@55.426,49.717 v1(56.426,49.717) ; U2.31@56,55.967 56.005,55.973 57.462,55.973 v1(57.468,55.978) ; v1@62.643,41.121 62.644,41.12 J4.5@62.644,39.582
  Power and signals w0.16: v1(56.426,49.717) 57.468,50.759 v1(57.468,55.978)
  Bottom Layer w0.16: ?.1@55.426,49.717 v1(56.426,49.717) ; v1(57.468,55.978) 60.618,52.828 60.618,40.478 60.942,40.154 62.286,40.154 62.643,40.511 v1(62.643,41.041)
"2 M1": ?.1@66.94,42.68 J4.1 U3.8 | length 33.7
  Top Layer w0.5: v1(58.64,38.01) J4.1@58.64,39.578 ; ?.1@66.94,42.68 v1(67.94,42.68)
  Top Layer w1.2: 58.321,39.598 56.343,39.598 55.64,40.301 55.64,43.649 56.343,44.352 61.239,44.352 61.861,44.974 61.861,45.457
  Power and signals w0.5: v1(58.64,38.01) 58.64,37.323 58.933,37.03 67.96,37.03 68.93,38 68.93,41.69 v1(67.94,42.68)
  Bottom Layer w0.5: ?.1@66.94,42.68 v1(67.94,42.68)
"2 M2": ?.1@66.94,40.168 J4.2 U3.10 | length 26.1
  Top Layer w0.5: 59.644,41.014 J4.2@59.644,39.582 59.644,38.016 v1(59.65,38.01) ; 66.015,44.787 66.015,45.867 66.72,46.572 U3.10@67.601,46.572 ; ?.1@66.94,40.168 v1(67.94,40.168)
  Top Layer w1.2: 59.644,41.014 59.644,41.723 60.347,42.426 61.836,42.426 64.197,44.787 65.636,44.787
  Power and signals w0.5: v1(59.65,38.01) 67.52,38.01 67.94,38.43 v1(67.94,40.168)
  Bottom Layer w0.5: ?.1@66.94,40.168 v1(67.94,40.168)
2USB_N: R7.2 U2.23 | length 15.4
  Top Layer w0.27: R7.2@37.171,53.472 37.456,53.757 v1@38.496,53.757 ; U2.23@49,54.917 49,55.117 49.164,55.281 49.164,55.911
  Top Layer w0.291: R7.2@37.171,53.452 R7.2@37.171,53.472
  Power and signals w0.27: v1(38.496,53.717) 38.53,53.752 38.677,53.752 38.731,53.805 41.269,53.805 42.53,55.067 45.346,55.067 47.476,57.197 48.678,57.197 49.174,56.701 49.174,56.372 49.12,56.318 49.12,56.172 v1(49.086,56.137)
2USB_P: R8.2 U2.24 | length 16.1
  Top Layer w0.27: R8.2@37.306,54.467 37.521,54.251 v1@38.323,54.251 ; 49.658,55.911 49.658,55.309 49.85,55.117 U2.24@49.85,54.917
  Top Layer w0.291: R8.2@37.171,54.647 37.306,54.513 R8.2@37.306,54.467
  Power and signals w0.27: v1(38.496,54.367) 38.53,54.333 38.677,54.333 38.731,54.279 41.073,54.279 42.334,55.54 45.15,55.54 47.28,57.67 48.874,57.67 49.648,56.897 49.648,56.372 49.702,56.318 49.702,56.172 v1(49.736,56.137)
"5V USB": J1.A4 J1.A9 J1.B4 J1.B9 R56.2 | length 14.6
  Top Layer w0.5: J1.B4@24.081,5.507 24.081,4.659 24.744,3.996 26.806,3.996 27.27,4.46 27.27,4.947 27.563,5.24 R56.2@28.03,5.24
  Bottom Layer w0.5: J1.A4@19.831,6.857 19.831,4.735 20.124,4.442 23.788,4.442 24.081,4.735 J1.B4@24.081,5.507 J1.A9@24.081,6.857
"ADC WALL IR 1": C10.1 R5.2 U2.10 | length 3.5
  Top Layer w0.16: R5.2@38.546,60.227 38.556,60.217 U2.10@42,60.217
"ADC WALL IR 2": C12.1 R10.2 U2.9 | length 7.2
  Top Layer w0.16: R10.2@36.146,60.227 36.146,60.759 36.24,60.852 37.352,60.852 37.346,60.847 ; C12.1@37.346,60.222 37.346,60.847 ; U2.9@42,61.067 39.461,61.067 39.24,60.847 37.346,60.847
"ADC WALL IR 3": C21.1 R17.2 U2.8 | length 4.4
  Top Layer w0.16: R17.2@38.546,63.213 38.551,63.208 C21.1@39.746,63.208 40.28,63.208 40.734,62.753 40.734,62.011 40.828,61.917 U2.8@42,61.917
"ADC WALL IR 4": C24.1 R18.2 U2.7 | length 7.5
  Top Layer w0.16: R18.2@36.146,63.208 36.146,63.722 36.24,63.816 37.337,63.816 ; C24.1@37.346,63.208 37.346,63.807 37.337,63.816 ; U2.7@42,62.767 41.366,62.767 40.318,63.816 37.337,63.816
"ADC WALL IR 5": C15.1 R54.2 U2.5 | length 8.8
  Top Layer w0.16: R54.2@36.146,66.168 36.146,66.663 36.24,66.757 37.35,66.757 ; C15.1@37.346,66.167 37.346,66.753 37.35,66.757 ; U2.5@42,64.467 41.006,64.467 40.766,64.707 40.766,66.161 40.17,66.757 37.35,66.757
"ADC WALL IR 6": C19.1 R55.2 U2.6 | length 5.4
  Top Layer w0.16: R55.2@38.546,66.167 C19.1@39.746,66.167 40.204,66.167 40.456,65.915 40.456,64.315 41.144,63.627 41.99,63.627 U2.6@42,63.617
BAT: J2.1 Q9.1 Q9.2 Q9.3 R25.2 | length 11.2
  Top Layer w0.5: R25.2@70.011,6.928 71.168,6.928 71.461,6.635 71.461,3.487
  Top Layer w1.7: Q9.1@69.671,1.632 Q9.2@69.671,2.902 69.671,3.487 ; 69.671,3.622 69.671,3.487 ; J2.1@73.75,4.435 72.409,4.435 71.461,3.487 69.671,3.487
BOOT: ?.1@60.046,65.277 R6.1 S1.2 S1.3 U2.4 | length 124
  Top Layer w0.16: v1(35.031,66.272) 35.826,67.067 37.543,67.067 37.545,67.069 ; R6.1@37.538,67.688 37.538,67.076 37.545,67.069 ; v1(42.783,5.397) 44.339,5.397 44.433,5.304 S1.3@44.433,3.332 S1.2@48.533,3.332 ; v1(43.2,65.33) 43.194,65.324 42.006,65.324 U2.4@42,65.317 41.081,65.317 41.081,66.388 40.4,67.069 37.545,67.069 ; ?.1@60.046,65.277 v1(61.046,65.277)
  Power and signals w0.16: v1(43.2,65.33) 43.2,66.59 44.52,67.91 60.07,67.91 61.046,66.934 v1(61.046,65.277)
  Bottom Layer w0.16: v1(35.031,66.272) 25.456,56.697 25.456,12.759 25.55,12.665 35.036,12.665 35.13,12.572 35.13,5.491 35.224,5.397 v1(42.783,5.397) ; ?.1@60.046,65.277 v1(61.046,65.277)
CS: U2.14 U5.12 | length 31.3
  Top Layer w0.16: U2.14@42,56.817 40.464,56.817 40.37,56.724 40.37,52.373 42.55,50.193 v1(42.55,36.92)
  Bottom Layer w0.16: v1(42.55,36.92) 42.59,36.88 42.848,36.88 48.465,31.263 48.465,30.641 U5.12@48.502,30.604
"DIR M1": U1.2 U2.38 | length 36
  Top Layer w0.16: v1(29.862,53.197) 29.844,53.197 29.123,52.476 29.123,50.125 29.426,49.822 U1.2@30.399,49.822 ; v1(45.756,58.017) 46.956,59.217 54.486,59.217 54.58,59.311 54.58,61.825 54.674,61.919 55.998,61.919 U2.38@56,61.917
  Bottom Layer w0.16: v1(29.862,53.197) 33.061,56.396 44.135,56.396 v1(45.756,58.017)
"DIR M2": U2.35 U3.2 | length 14.5
  Top Layer w0.16: U2.35@56,59.367 59.316,59.367 59.453,59.231 59.453,51.251 60.882,49.822 U3.2@61.861,49.822
EN: ?.1@57.916,65.292 C2.2 R1.1 S2.2 S2.3 U2.45 | length 120.8
  Top Layer w0.16: S2.2@42.783,3.332 S2.3@38.683,3.332 38.683,5.816 38.777,5.91 48.439,5.91 48.533,5.816 v1(48.533,5.397) ; U2.45@56,67.867 57.606,67.867 ; R1.1@57.606,68.432 57.606,67.867 ; ?.1@57.916,65.292 v1(58.916,65.292) 58.916,66.757 58.346,67.327 C2.2@57.606,67.327 57.606,67.867 ; v1(61.59,56.3) 61.59,67.774 61.496,67.867 57.606,67.867
  Bottom Layer w0.16: v1(48.533,5.397) 53.119,5.397 55.411,7.69 64.756,7.69 64.85,7.784 64.85,19.466 64.944,19.56 72.086,19.56 72.18,19.654 72.18,51.144 72.086,51.237 67.376,51.237 62.313,56.3 v1(61.59,56.3) ; ?.1@57.916,65.292 v1(58.916,65.292)
FB: R19.2 R20.1 U4.6 | length 3.4
  Top Layer w0.16: R19.2@46.231,46.737 46.231,45.566 R20.1@46.25,45.547 46.792,45.547 46.886,45.454 46.886,44.712 47.08,44.518 47.48,44.518 U4.6@47.526,44.472